# EAGLE board PCB (EAGLE 9.7.0)
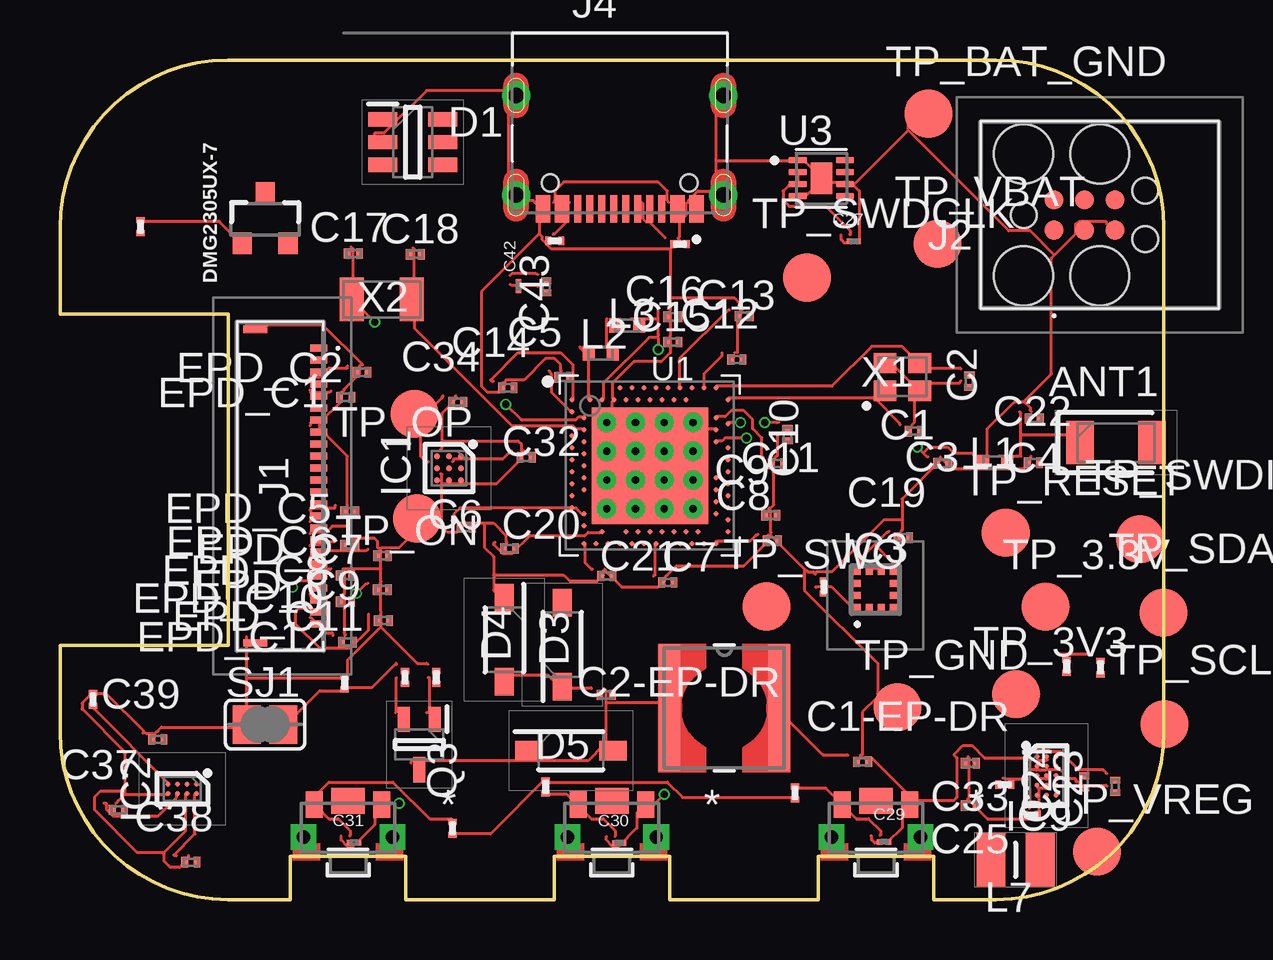
[diagram p0: board, top side]
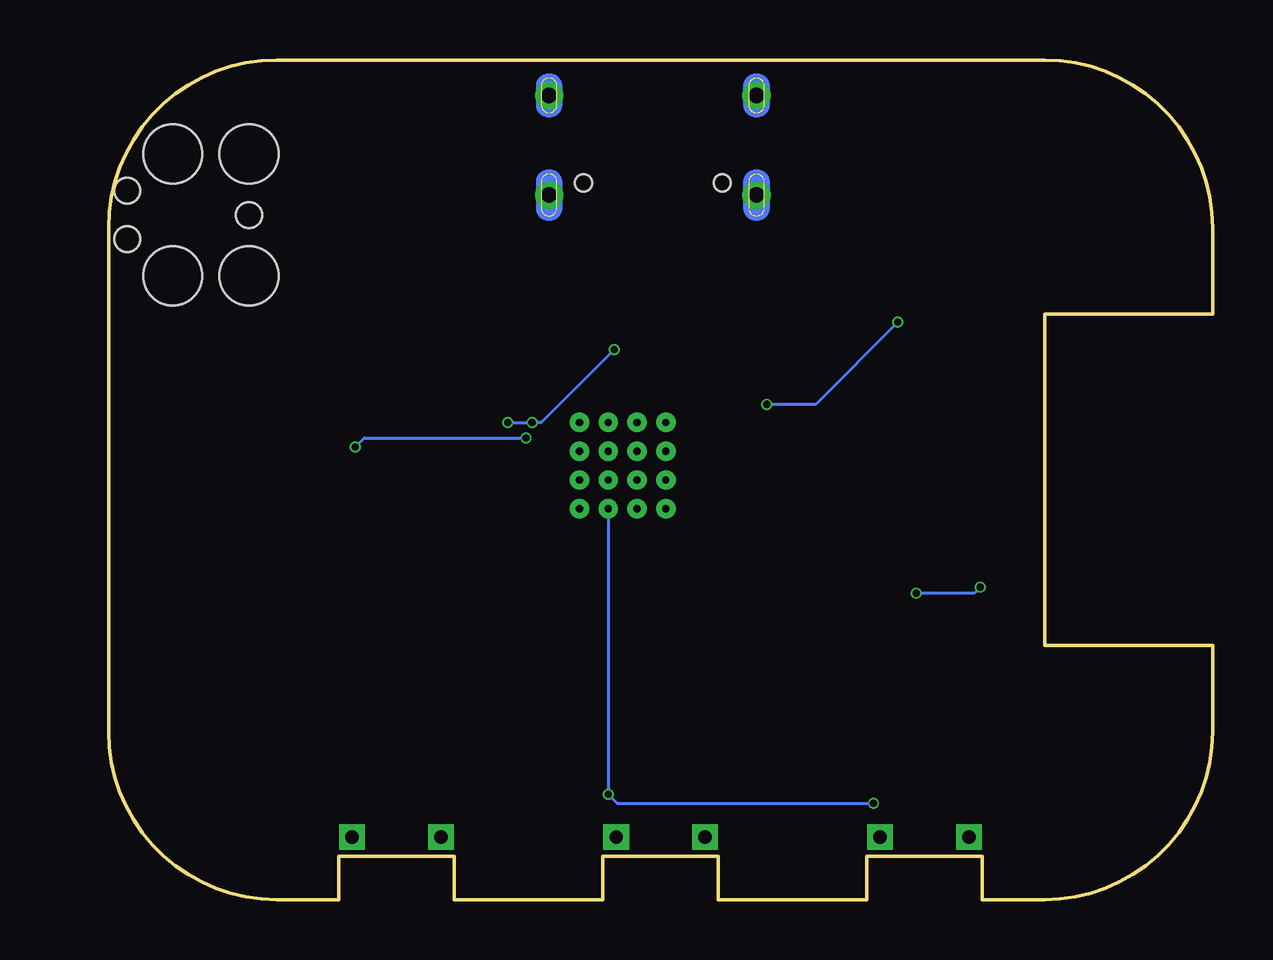
[diagram p1: board, bottom side, seen from below]

Size 46 x 35 mm. Coordinates in mm from the lower left corner, seen from the top.
Outline: 39,0 36.4,0 36.4,1.8 31.6,1.8 31.6,0 25.4,0 25.4,1.8 20.6,1.8 20.6,0 14.4,0 14.4,1.8 9.6,1.8 9.6,0 7,0 arc-90 0,7 0,10.6 7,10.6 7,24.4 0,24.4 0,28 arc-90 7,35 39,35 arc-90 46,28 46,7 arc-90 39,0
Copper layers (1*16): Top 0.035mm / dielectric 1.6mm / Bottom 0.035mm
Design rules "jlcpcb-2layers.dru": minimum track width 5mil, minimum drill 0.3mm, track to track 5mil, track to pad 5mil, pad to pad 5mil, via to via 5mil, smd to smd 5mil, copper to edge 0.2mm, drill to drill 6mil, minimum pad ring 10mil, minimum via ring 3mil, stop-mask expansion 4mil, vias tented up to drill 0mil, thermal gap 10mil

## Footprints (pad centres in the part's own frame; a part is rotated, then mirrored left to right if it is on the bottom)
2450AT18B100E_ANTC3216X140N = smd 1.15 x 1.8: 1 -1.5,0; 2 1.5,0
NORDIC_NRF_3_RESC0201_L = smd 0.28 x 0.43: 1 -0.255,0; 2 0.255,0
GRM011R60J152KE01L_2_CAPC0201X13N = smd 0.22 x 0.23: 1 -0.185,0; 2 0.185,0
ESP32_C6_LIBRARY_3_SOT95P280X145-6N = smd 1.2 x 0.6: 1 -1.25,0.95; 2 -1.25,0; 3 -1.25,-0.95; 4 1.25,-0.95; 5 1.25,0; 6 1.25,0.95
ESP32_C6_LIBRARY_5_SOD3716X135N = smd 1.15 x 0.8: 1 -1.75,0; 2 1.75,0
ESP32_C6_LIBRARY_4_ESP32_C6_LIBRARY_4_ESP32_C6_LIBRARY_4_ESP32_C6_LIBRARY_4_ESP32_WROVER_SPARKFUN-DISCRETESEMI_SOT23-3 = smd 0.8 x 0.9: 1 -0.95,-1; 2 0.95,-1; 3 0,1.1
DRV2605YZFR_BGA9C50P3X3_144X144X62 = smd 0.25 x 0.25: A1 -0.5,0.5; A2 0,0.5; A3 0.5,0.5; B1 -0.5,0; B2 0,0; B3 0.5,0; C1 -0.5,-0.5; C2 0,-0.5; C3 0.5,-0.5
BQ25180YBGR_BGA8C40P2X4_100X155X50 = smd 0.2 x 0.2: A1 -0.2,0.6; A2 0.2,0.6; B1 -0.2,0.2; B2 0.2,0.2; C1 -0.2,-0.2; C2 0.2,-0.2; D1 -0.2,-0.6; D2 0.2,-0.6
BMA423_BMA423 = smd 0.3 x 0.35: 1 -0.75,-0.775; 2 -0.25,-0.775; 3 0.25,-0.775; 4 0.75,-0.775; 7 0.75,0.775; 8 0.25,0.775; 9 -0.25,0.775; 10 -0.75,0.775 | smd 0.35 x 0.3: 5 0.775,-0.25; 6 0.775,0.25; 11 -0.775,0.25; 12 -0.775,-0.25
RT6160AWSC_BGA15C40P3X5_140X230X60 = smd 0.216 x 0.216: A1 -0.4,0.8; A2 0,0.8; A3 0.4,0.8; B1 -0.4,0.4; B2 0,0.4; B3 0.4,0.4; C1 -0.4,0; C2 0,0; C3 0.4,0; D1 -0.4,-0.4; D2 0,-0.4; D3 0.4,-0.4; E1 -0.4,-0.8; E2 0,-0.8; E3 0.4,-0.8
503480-2400_5034802400 = smd 0.3 x 0.7: 1 -5.75,1.525; 2 -5.25,1.525; 3 -4.75,1.525; 4 -4.25,1.525; 5 -3.75,1.525; 6 -3.25,1.525; 7 -2.75,1.525; 8 -2.25,1.525; 9 -1.75,1.525; 10 -1.25,1.525; 11 -0.75,1.525; 12 -0.25,1.525; 13 0.25,1.525; 14 0.75,1.525; 15 1.25,1.525; 16 1.75,1.525; 17 2.25,1.525; 18 2.75,1.525; 19 3.25,1.525; 20 3.75,1.525; 21 4.25,1.525; 22 4.75,1.525; 23 5.25,1.525; 24 5.75,1.525 | smd 0.3 x 1: MP1 -6.54,-1.125; MP2 6.54,-1.125
TC2030-IDC_TC2030IDC = smd 0.783 x 0.783: 1 -0.953,-0.635; 2 -0.953,0.635; 3 0.317,-0.635; 4 0.317,0.635; 5 1.588,-0.635; 6 1.588,0.635 | hole 2.451: -2.223,-2.54; -2.223,2.54; 0.952,-2.54; 0.952,2.54 | hole 1.067: -2.223,0; 2.857,-1.016; 2.857,1.016
KH-TYPE-C-16P_KINGHELM_KH-TYPE-C-16P = smd 0.6 x 1.15: A1_B12 -3.2,4.725; A4_B9 -2.4,4.725; A9_B4 2.4,4.725; A12_B1 3.2,4.725 | smd 0.3 x 1.15: A5 -1.25,4.725; A6 -0.25,4.725; A7 0.25,4.725; A8 1.25,4.725; B5 1.75,4.725; B6 0.75,4.725; B7 -0.75,4.725; B8 -1.75,4.725 | drill 0.65 pad 1.05: SH1 -4.32,0; SH2 4.32,0; SH3 -4.32,4.15; SH4 4.32,4.15 | hole 0.7: -2.89,3.65; 2.89,3.65
NORDIC_NRF_2_RESC0402_L = smd 0.5 x 0.6: 1 -0.5,0; 2 0.5,0
ESP32_C6_LIBRARY_2_IND_4828-WE-TPC_WRE = smd 0.9 x 5.3: 1 -2.286,0; 2 2.286,0
MLP2016SR47MT0S1_INDC2016X100N = smd 1.2 x 2.2: 1 -1.028,0; 2 1.028,0
ESP32_C6_LIBRARY_6_SOT65P210X110-3N = smd 1.05 x 0.5: 1 -1.05,0.65; 2 -1.05,-0.65; 3 1.05,0
ERA-1AEB3401C_0201 = smd 0.35 x 0.25: 1 0,0.275; 2 0,-0.275
ESP32_C6_LIBRARY_7_JUMPER_SJ = smd 1.168 x 1.6: 1 -0.762,0; 2 0.762,0
2025-10-22_07-23-44_LIBRARY_SW_EVP-AKE31A_PAN = smd 0.711 x 1.092: 1 -1.4,-0.972; 2 1.4,-0.972 | drill 0.559 pad 0.914 square: 3 -1.848,0.381; 4 1.848,0.381 | smd 1.397 x 1.092: 5 0,-1.124
HECTOR_WATCH_1_TP20R = smd 2 x 2: TP 0,0
NORDIC_NRF_4_AQFN50P700X700X85_HS-74N = smd 4.85 x 4.85: P$74 0,0 | drill 0.3 pad 0.6: P$75 -1.8,1.8; P$76 -0.6,1.8; P$77 0.6,1.8; P$78 1.8,1.8; P$79 -1.8,0.6; P$80 -0.6,0.6; P$81 0.6,0.6; P$82 1.8,0.6; P$83 -1.8,-0.6; P$84 -0.6,-0.6; P$85 0.6,-0.6; P$86 1.8,-0.6; P$87 -1.8,-1.8; P$88 -0.6,-1.8; P$89 0.6,-1.8; P$90 1.8,-1.8 | smd 0.2 x 0.2: P$A8 -1.25,3.25; P$A10 -0.75,3.25; P$A12 -0.25,3.25; P$A14 0.25,3.25; P$A16 0.75,3.25; P$A18 1.25,3.25; P$A20 1.75,3.25; P$A22 2.25,3.25; P$A23 2.75,3.25; P$AA24 3.25,-2.25; P$AB2 -2.75,-2.5; P$AC5 -2,-2.75; P$AC9 -1,-2.75; P$AC11 -0.5,-2.75; P$AC13 0,-2.75; P$AC15 0.5,-2.75; P$AC17 1,-2.75; P$AC19 1.5,-2.75; P$AC21 2,-2.75; P$AC24 3.25,-2.75; P$AD2 -2.75,-3.25; P$AD4 -2.25,-3.25; P$AD6 -1.75,-3.25; P$AD8 -1.25,-3.25; P$AD10 -0.75,-3.25; P$AD12 -0.25,-3.25; P$AD14 0.25,-3.25; P$AD16 0.75,-3.25; P$AD18 1.25,-3.25; P$AD20 1.75,-3.25; P$AD22 2.25,-3.25; P$AD23 2.75,-3.25; P$B1 -3.25,2.75; P$B3 -2.5,2.75; P$B5 -2,2.75; P$B7 -1.5,2.75; P$B9 -1,2.75; P$B11 -0.5,2.75; P$B13 0,2.75; P$B15 0.5,2.75; P$B17 1,2.75; P$B19 1.5,2.75; P$B24 3.25,2.75; P$C1 -3.25,2.25; P$D2 -2.75,2; P$D23 2.75,2; P$E24 3.25,1.75; P$F2 -2.75,1.5; P$F23 2.75,1.5; P$G1 -3.25,1.25; P$H2 -2.75,1; P$H23 2.75,1; P$J1 -3.25,0.75; P$J24 3.25,0.75; P$K2 -2.75,0.5; P$L1 -3.25,0.25; P$L24 3.25,0.25; P$M2 -2.75,0; P$N1 -3.25,-0.25; P$N24 3.25,-0.25; P$P2 -2.75,-0.5; P$P23 2.75,-0.5; P$R1 -3.25,-0.75; P$R24 3.25,-0.75; P$T2 -2.75,-1; P$T23 2.75,-1; P$U1 -3.25,-1.25; P$U24 3.25,-1.25; P$V23 2.75,-1.5; P$W1 -3.25,-1.75; P$W24 3.25,-1.75; P$Y2 -2.75,-2; P$Y23 2.75,-2
ESP32_C6_LIBRARY_SON50P200X200X80-9N = smd 0.76 x 0.27: 1 -0.985,0.75; 2 -0.985,0.25; 3 -0.985,-0.25; 4 -0.985,-0.75; 5 0.985,-0.75; 6 0.985,-0.25; 7 0.985,0.25; 8 0.985,0.75 | smd 0.9 x 1.3: 9 0,0
NORDIC_NRF_BT-XTAL_2016_N = smd 0.95 x 0.85: 1 -0.725,-0.575; 2 0.725,-0.575; 3 0.725,0.575; 4 -0.725,0.575
NORDIC_NRF_1_XTAL_3215_N = smd 1 x 1.8: 1 -1.25,0; 2 1.25,0

## Placement (x,y rotation side)
ANT1  2450AT18B100E_2450AT18B100E  [2450AT18B100E_ANTC3216X140N]  44,19.05 0 top
C1  12pF  [NORDIC_NRF_3_RESC0201_L]  35.6,19.53 0 top
C1-EP-DR  10µF  [NORDIC_NRF_3_RESC0201_L]  33.45,5.74 0 top
C2  12pF  [NORDIC_NRF_3_RESC0201_L]  37.89,21.61 270 top
C2-EP-DR  4.7µF/25V  [NORDIC_NRF_3_RESC0201_L]  22.75,8.53 0 top
C3  1pF  [NORDIC_NRF_3_RESC0201_L]  36.78,18.18 0 top
C4  1pF  [NORDIC_NRF_3_RESC0201_L]  40.56,18.21 0 top
C5  100nF  [NORDIC_NRF_3_RESC0201_L]  20.99,21.77 0 top
C6  4.7µF  [NORDIC_NRF_3_RESC0201_L]  16.92,15.52 0 top
C7  100nF  [NORDIC_NRF_3_RESC0201_L]  25.33,13.22 0 top
C8  100nF  [NORDIC_NRF_3_RESC0201_L]  29.68,14.95 0 top
C9  820pF  [NORDIC_NRF_3_RESC0201_L]  29.62,16.02 0 top
C10  N.C.  [NORDIC_NRF_3_RESC0201_L]  30.31,19.38 270 top
C11  100pF  [NORDIC_NRF_3_RESC0201_L]  29.89,18.17 0 top
C12  100nF  [NORDIC_NRF_3_RESC0201_L]  28.2,22.51 0 top
C13  N.C.  [NORDIC_NRF_3_RESC0201_L]  28.51,24.32 0 top
C14  4.7µF  [NORDIC_NRF_3_RESC0201_L]  18.66,21.33 0 top
C15  N.C.  [NORDIC_NRF_3_RESC0201_L]  25.53,23.24 0 top
C16  27nF  [NORDIC_NRF_3_RESC0201_L]  25.53,24.29 0 top
C17  12pF  [NORDIC_NRF_3_RESC0201_L]  12.22,26.93 0 top
C18  12pF  [NORDIC_NRF_3_RESC0201_L]  14.8,26.9 0 top
C19  100nF  [NORDIC_NRF_3_RESC0201_L]  35.14,15.08 0 top
C20  4.7µF  [NORDIC_NRF_3_RESC0201_L]  18.73,14.63 0 top
C21  4.7µF  [NORDIC_NRF_3_RESC0201_L]  22.79,13.49 0 top
C22  N.C.  [NORDIC_NRF_3_RESC0201_L]  40.58,20.05 0 top
C23  0.1uF  [NORDIC_NRF_3_RESC0201_L]  43.97,4.72 90 top
C24  10uF  [NORDIC_NRF_3_RESC0201_L]  42.68,4.9 90 top
C25  22uF  [NORDIC_NRF_3_RESC0201_L]  37.92,3.91 180 top
C27  GRM011R60J152KE01L_2_GRM011R60J152KE01L  [GRM011R60J152KE01L_2_CAPC0201X13N]  33.08,27.43 0 top
C29  GRM011R60J152KE01L_2_GRM011R60J152KE01L  [GRM011R60J152KE01L_2_CAPC0201X13N]  34.33,2.4 0 top
C30  GRM011R60J152KE01L_2_GRM011R60J152KE01L  [GRM011R60J152KE01L_2_CAPC0201X13N]  23.3,2.36 0 top
C31  GRM011R60J152KE01L_2_GRM011R60J152KE01L  [GRM011R60J152KE01L_2_CAPC0201X13N]  12.25,2.37 0 top
C32  1µF  [NORDIC_NRF_3_RESC0201_L]  19.42,18.43 0 top
C33  22uF  [NORDIC_NRF_3_RESC0201_L]  37.92,5.68 180 top
C34  0.1µF  [NORDIC_NRF_3_RESC0201_L]  16.57,20.74 0 top
C37  [NORDIC_NRF_3_RESC0201_L]  2.43,3.74 0 top
C38  [NORDIC_NRF_3_RESC0201_L]  5.45,1.56 0 top
C39  [NORDIC_NRF_3_RESC0201_L]  4.07,6.68 0 top
C42  GRM011R60J152KE01L_2_GRM011R60J152KE01L  [GRM011R60J152KE01L_2_CAPC0201X13N]  19.11,25.57 90 top
C43  4.7uF  [NORDIC_NRF_3_RESC0201_L]  20.26,25.54 270 top
D1  ESP32_C6_LIBRARY_3_USBLC6-2SC6Y  [ESP32_C6_LIBRARY_3_SOT95P280X145-6N]  14.7,31.57 0 top
D3  ESP32_C6_LIBRARY_5_MBR0530  [ESP32_C6_LIBRARY_5_SOD3716X135N]  20.93,10.63 90 top
D4  ESP32_C6_LIBRARY_5_MBR0530  [ESP32_C6_LIBRARY_5_SOD3716X135N]  18.51,10.83 270 top
D5  ESP32_C6_LIBRARY_5_MBR0530  [ESP32_C6_LIBRARY_5_SOD3716X135N]  21.29,6.21 0 top
DMG2305UX-7  20V/4.2A/52mΩ/1.4W  [ESP32_C6_LIBRARY_4_ESP32_C6_LIBRARY_4_ESP32_C6_LIBRARY_4_ESP32_C6_LIBRARY_4_ESP32_WROVER_SPARKFUN-DISCRETESEMI_SOT23-3]  8.55,28.36 0 top
EPD_C1  1uF/50V  [NORDIC_NRF_3_RESC0201_L]  11.91,20.93 180 top
EPD_C2  1uF/50V  [NORDIC_NRF_3_RESC0201_L]  12.58,21.98 180 top
EPD_C5  0.1uF/50V  [NORDIC_NRF_3_RESC0201_L]  12.08,16.17 180 top
EPD_C6  0.1uF/50V  [NORDIC_NRF_3_RESC0201_L]  12.07,14.78 180 top
EPD_C7  0.1uF/50V  [NORDIC_NRF_3_RESC0201_L]  13.44,14.33 180 top
EPD_C8  0.1uF/50V  [NORDIC_NRF_3_RESC0201_L]  11.89,13.51 180 top
EPD_C9  0.1uF/50V  [NORDIC_NRF_3_RESC0201_L]  13.43,12.91 180 top
EPD_C10  0.1uF/50V  [NORDIC_NRF_3_RESC0201_L]  11.89,12.41 180 top
EPD_C11  0.1uF/50V  [NORDIC_NRF_3_RESC0201_L]  13.47,11.63 180 top
EPD_C12  0.1uF/50V  [NORDIC_NRF_3_RESC0201_L]  11.98,10.73 180 top
IC1  DRV2605YZFR_DRV2605YZFR  [DRV2605YZFR_BGA9C50P3X3_144X144X62]  16.21,17.98 270 top
IC2  BQ25180YBGR_BQ25180YBGR  [BQ25180YBGR_BGA8C40P2X4_100X155X50]  5.1,4.62 270 top
IC3  BMA423_BMA423  [BMA423_BMA423]  33.97,12.93 0 top
IC9  RT6160AWSC_RT6160AWSC  [RT6160AWSC_BGA15C40P3X5_140X230X60]  41.1,5.16 0 top
J1  503480-2400_503480-2400  [503480-2400_5034802400]  9.25,17.23 270 top
J2  TC2030-IDC_TC2030-IDC  [TC2030-IDC_TC2030IDC]  42.37,28.54 0 top
J4  KH-TYPE-C-16P_KH-TYPE-C-16P  [KH-TYPE-C-16P_KINGHELM_KH-TYPE-C-16P]  23.32,33.52 180 top
L1  3.9nH  [NORDIC_NRF_2_RESC0402_L]  38.97,18.22 0 top
L2  10µH  [NORDIC_NRF_2_RESC0402_L]  22.52,22.77 0 top
L3  15nH  [NORDIC_NRF_2_RESC0402_L]  23.64,23.93 0 top
L5  68uH  [ESP32_C6_LIBRARY_2_IND_4828-WE-TPC_WRE]  27.68,7.98 0 top
L7  MLP2016SR47MT0S1_FTC252012SR47MBCA  [MLP2016SR47MT0S1_INDC2016X100N]  39.82,1.65 0 top
Q3  ESP32_C6_LIBRARY_6_SI1308EDL-T1-GE3  [ESP32_C6_LIBRARY_6_SOT65P210X110-3N]  14.97,6.47 270 top
R1_EP_DR  ERA-1AEB3401C_CPF0201D7K68C1  [ERA-1AEB3401C_0201]  14.37,9.26 0 top
R1_USB  ERA-1AEB3401C_CPF0201D7K68C1  [ERA-1AEB3401C_0201]  25.83,27.32 90 top
R2  ERA-1AEB3401C_CPF0201D7K68C1  [ERA-1AEB3401C_0201]  40.47,3.53 90 top
R2_EP_DR  ERA-1AEB3401C_CPF0201D7K68C1  [ERA-1AEB3401C_0201]  15.68,9.27 0 top
R2_USB  ERA-1AEB3401C_CPF0201D7K68C1  [ERA-1AEB3401C_0201]  20.61,27.46 270 top
R3  ERA-1AEB3401C_CPF0201D7K68C1  [ERA-1AEB3401C_0201]  31.83,13.03 0 top
R4  ERA-1AEB3401C_CPF0201D7K68C1  [ERA-1AEB3401C_0201]  39.36,4.79 90 top
R5  ERA-1AEB3401C_CPF0201D7K68C1  [ERA-1AEB3401C_0201]  20.24,4.7 180 top
R7  ERA-1AEB3401C_CPF0201D7K68C1  [ERA-1AEB3401C_0201]  30.63,4.45 0 top
R8  ERA-1AEB3401C_CPF0201D7K68C1  [ERA-1AEB3401C_0201]  16.35,2.97 0 top
R9  ERA-1AEB3401C_CPF0201D7K68C1  [ERA-1AEB3401C_0201]  1.37,8.34 0 top
R17  ERA-1AEB3401C_CPF0201D7K68C1  [ERA-1AEB3401C_0201]  41.95,9.71 0 top
R18  ERA-1AEB3401C_CPF0201D7K68C1  [ERA-1AEB3401C_0201]  43.35,9.67 0 top
R_PWR_EPD  ERA-1AEB3401C_CPF0201D7K68C1  [ERA-1AEB3401C_0201]  3.35,28.06 0 top
R_TYPE_SEL  ERA-1AEB3401C_CPF0201D7K68C1  [ERA-1AEB3401C_0201]  11.86,9.03 0 top
SJ1  [ESP32_C6_LIBRARY_7_JUMPER_SJ]  8.55,7.3 0 top
SW_DN  2025-10-22_07-23-44_LIBRARY_EVP-AKE31ASW_EVP-AKE31A_PAN  [2025-10-22_07-23-44_LIBRARY_SW_EVP-AKE31A_PAN]  34,2.99 180 top
SW_ENT  2025-10-22_07-23-44_LIBRARY_EVP-AKE31ASW_EVP-AKE31A_PAN  [2025-10-22_07-23-44_LIBRARY_SW_EVP-AKE31A_PAN]  12,2.99 180 top
SW_UP  2025-10-22_07-23-44_LIBRARY_EVP-AKE31ASW_EVP-AKE31A_PAN  [2025-10-22_07-23-44_LIBRARY_SW_EVP-AKE31A_PAN]  23,2.99 180 top
TP_3.3V  HECTOR_WATCH_1_TPTP20R  [HECTOR_WATCH_1_TP20R]  41.06,12.21 0 top
TP_3V3  HECTOR_WATCH_1_TPTP20R  [HECTOR_WATCH_1_TP20R]  39.84,8.56 0 top
TP_BAT_GND  HECTOR_WATCH_1_TPTP20R  [HECTOR_WATCH_1_TP20R]  36.19,32.76 0 top
TP_GND  HECTOR_WATCH_1_TPTP20R  [HECTOR_WATCH_1_TP20R]  34.9,8.02 0 top
TP_ON  HECTOR_WATCH_1_TPTP20R  [HECTOR_WATCH_1_TP20R]  14.88,15.89 0 top
TP_OP  HECTOR_WATCH_1_TPTP20R  [HECTOR_WATCH_1_TP20R]  14.77,20.26 0 top
TP_RESET  HECTOR_WATCH_1_TPTP20R  [HECTOR_WATCH_1_TP20R]  39.41,15.29 0 top
TP_SCL  HECTOR_WATCH_1_TPTP20R  [HECTOR_WATCH_1_TP20R]  46.02,7.31 0 top
TP_SDA  HECTOR_WATCH_1_TPTP20R  [HECTOR_WATCH_1_TP20R]  45.97,11.96 0 top
TP_SWDCLK  HECTOR_WATCH_1_TPTP20R  [HECTOR_WATCH_1_TP20R]  31.12,25.93 0 top
TP_SWDIO  HECTOR_WATCH_1_TPTP20R  [HECTOR_WATCH_1_TP20R]  45,15.03 0 top
TP_SWO  HECTOR_WATCH_1_TPTP20R  [HECTOR_WATCH_1_TP20R]  29.43,12.22 0 top
TP_VBAT  HECTOR_WATCH_1_TPTP20R  [HECTOR_WATCH_1_TP20R]  36.57,27.34 0 top
TP_VREG  HECTOR_WATCH_1_TPTP20R  [HECTOR_WATCH_1_TP20R]  43.22,2.01 0 top
U1  NORDIC_NRF_4_NRF52840_QF  [NORDIC_NRF_4_AQFN50P700X700X85_HS-74N]  24.58,18.09 0 top
U3  ESP32_C6_LIBRARY_MAX17048G+T10  [ESP32_C6_LIBRARY_SON50P200X200X80-9N]  31.72,30.07 0 top
X1  [NORDIC_NRF_BT-XTAL_2016_N]  35.1,21.79 0 top
X2  32.768kHz  [NORDIC_NRF_1_XTAL_3215_N]  13.41,25.02 0 top

## Library data of the parts
ANT1 = InkTime_v5; ARROW_PART_NUMBER: 2450AT18B100E; ARROW_PRICE-STOCK: https://www.arrow.com/en/products/2450at18b100e/johanson-dielectrics?utm_currency=USD&region=nac; DESCRIPTION: Antennas 2.45GHz ANTENNA; HEIGHT: 1.4mm; MANUFACTURER_NAME: JOHANSON TECHNOLOGY; MANUFACTURER_PART_NUMBER: 2450AT18B100E; MOUSER_PART_NUMBER: 609-2450AT18B100E; MOUSER_PRICE-STOCK: https://www.mouser.co.uk/ProductDetail/Johanson-Technology/2450AT18B100E?qs=yCnrNFeXz%252Bh5MFsFIXGZGA%3D%3D
C1 C1-EP-DR C2 C2-EP-DR C3-C25 C32-C34 C37-C39 C43 EPD_C1 EPD_C2 EPD_C5-EPD_C12 L1-L3 R1_EP_DR R1_USB R2 R2_EP_DR R2_USB R3-R5 R7-R9 R17 R18 R_PWR_EPD R_TYPE_SEL SJ1 TP_3.3V TP_3V3 TP_BAT_GND TP_GND TP_ON TP_OP TP_RESET TP_SCL TP_SDA TP_SWDCLK TP_SWDIO TP_SWO TP_VBAT TP_VREG U1 X1 X2 = InkTime_v5
C27 C29-C31 C42 = InkTime_v5; AVAILABILITY: In Stock; CHECK_PRICES: https://www.snapeda.com/parts/GRM011R60J152KE01L/Murata/view-part/?ref=eda; DESCRIPTION: SMD Capacitor X5R(EIA) with Capacitance: 1500pF Tol. 10%. Rated Voltage: 6.3Vdc; MF: Murata; MP: GRM011R60J152KE01L; PACKAGE: 0201 Murata; PRICE: None; SNAPEDA_LINK: https://www.snapeda.com/parts/GRM011R60J152KE01L/Murata/view-part/?ref=snap
D1 = InkTime_v5; AVAILABILITY: In Stock; CHECK_PRICES: https://www.snapeda.com/parts/USBLC6-2SC6Y/STMicroelectronics/view-part/?ref=eda; DESCRIPTION: 17V Clamp 5A (8/20µs) Ipp Tvs Diode Surface Mount SOT-23-6; MF: STMicroelectronics; MP: USBLC6-2SC6Y; PACKAGE: SOT-23-6 STMicroelectronics; PRICE: None; SNAPEDA_LINK: https://www.snapeda.com/parts/USBLC6-2SC6Y/STMicroelectronics/view-part/?ref=snap
D3-D5 = InkTime_v5; AVAILABILITY: In Stock; CHECK_PRICES: https://www.snapeda.com/parts/MBR0530/Onsemi/view-part/?ref=eda; DESCRIPTION: Diode Schottky 30 V 500mA Surface Mount SOD-123; MF: ON Semiconductor; MP: MBR0530; PACKAGE: SOD-123-2 ON Semiconductor; PRICE: None; PURCHASE-URL: https://www.snapeda.com/api/url_track_click_mouser/?unipart_id=179458&manufacturer=ON Semiconductor&part_name=MBR0530&search_term=None; SNAPEDA_LINK: https://www.snapeda.com/parts/MBR0530/Onsemi/view-part/?ref=snap
DMG2305UX-7 = InkTime_v5; PROD_ID: TRAN-14388
IC1 = InkTime_v5; ARROW_PART_NUMBER: DRV2605YZFR; ARROW_PRICE-STOCK: https://www.arrow.com/en/products/drv2605yzfr/texas-instruments?region=nac; DESCRIPTION: Haptic Driver for ERM/LRA with Built-In Library and Smart Loop Architecture; HEIGHT: 0.625mm; MANUFACTURER_NAME: Texas Instruments; MANUFACTURER_PART_NUMBER: DRV2605YZFR
IC2 = InkTime_v5; ARROW_PART_NUMBER: BQ25180YBGR; ARROW_PRICE-STOCK: https://www.arrow.com/en/products/bq25180ybgr/texas-instruments?utm_currency=USD&region=nac; DESCRIPTION: Charger IC Lithium Ion/Polymer, Lithium Iron Phosphate 8-DSBGA (1.6x1.1); HEIGHT: 0.5mm; MANUFACTURER_NAME: Texas Instruments; MANUFACTURER_PART_NUMBER: BQ25180YBGR; MOUSER_PART_NUMBER: 595-BQ25180YBGR; MOUSER_PRICE-STOCK: https://www.mouser.co.uk/ProductDetail/Texas-Instruments/BQ25180YBGR?qs=doiCPypUmgEWjAK%252BJAX6Tw%3D%3D
IC3 = InkTime_v5; ARROW_PART_NUMBER: BMA423; ARROW_PRICE-STOCK: https://www.arrow.com/en/products/bma423/bosch; DESCRIPTION: Accelerometers Triaxial low-g 12bit Acceleration Sensor; HEIGHT: 1mm; MANUFACTURER_NAME: BOSCH; MANUFACTURER_PART_NUMBER: BMA423; MOUSER_PART_NUMBER: 262-BMA423; MOUSER_PRICE-STOCK: https://www.mouser.co.uk/ProductDetail/Bosch-Sensortec/BMA423?qs=HXFqYaX1Q2xC%252BSgeGoX3mg%3D%3D
IC9 = InkTime_v5; DESCRIPTION: Buck-Boost Regulator Positive Output Step-Up/Step-Down I2C DC-DC Controller IC 15-WL-CSP (BSC) (1.4x2.3); HEIGHT: 0.6mm; MANUFACTURER_NAME: RICHTEK; MANUFACTURER_PART_NUMBER: RT6160AWSC; MOUSER_PART_NUMBER: 835-RT6160AWSC; MOUSER_PRICE-STOCK: https://www.mouser.co.uk/ProductDetail/Richtek/RT6160AWSC?qs=amGC7iS6iy%2FLd9PSoixZXQ%3D%3D
J1 = InkTime_v5; DESCRIPTION: FFC & FPC Connectors 0.5mm FPC RA SMT Dual Contact 24Ckt; HEIGHT: 1.87mm; MANUFACTURER_NAME: Molex; MANUFACTURER_PART_NUMBER: 503480-2400; MOUSER_PART_NUMBER: 538-503480-2400; MOUSER_PRICE-STOCK: https://www.mouser.co.uk/ProductDetail/Molex/503480-2400?qs=OAhjpuo3Vu7efIoxFh9AOw%3D%3D
J2 = InkTime_v5; DESCRIPTION: CABLE ADAPTER 6 POS; HEIGHT: 19mm; MANUFACTURER_NAME: Tag Connect; MANUFACTURER_PART_NUMBER: TC2030-IDC
J4 = InkTime_v5; AVAILABILITY: Not in stock; CHECK_PRICES: https://www.snapeda.com/parts/KH-TYPE-C-16P/Kinghelm/view-part/?ref=eda; MF: kinghelm; MP: KH-TYPE-C-16P; PACKAGE: None; PRICE: None; SNAPEDA_LINK: https://www.snapeda.com/parts/KH-TYPE-C-16P/Kinghelm/view-part/?ref=snap
L5 = InkTime_v5; COPYRIGHT: Copyright (C) 2024 Ultra Librarian. All rights reserved.; MANUFACTURER_PART_NUMBER: 744043680; MFR_NAME: Wurth Electronics
L7 = InkTime_v5; DESCRIPTION: SMD / SMT Inductors (Coils), L=0.47?H, L x W x T :; HEIGHT: 1mm; JLCPCB: https://jlcpcb.com/partdetail/6763488-FTC252012SR47MBCA/C5832368; MANUFACTURER_NAME: TDK; MANUFACTURER_PART_NUMBER: FTC252012SR47MBCA
Q3 = InkTime_v5; AVAILABILITY: In Stock; CHECK_PRICES: https://www.snapeda.com/parts/SI1308EDL-T1-GE3/Vishay+Siliconix/view-part/?ref=eda; DESCRIPTION: Si1308EDL-T1-GE3 N-channel MOSFET Transistor, 1.5 A, 30 V, 3-Pin SC-70 | Siliconix / Vishay SI1308EDL-T1-GE3; MF: Vishay Siliconix; MP: SI1308EDL-T1-GE3; PACKAGE: SOT-323 Vishay Semiconductor; PRICE: None; PURCHASE-URL: https://www.snapeda.com/api/url_track_click_mouser/?unipart_id=274603&manufacturer=Vishay Siliconix&part_name=SI1308EDL-T1-GE3&search_term=None; SNAPEDA_LINK: https://www.snapeda.com/parts/SI1308EDL-T1-GE3/Vishay+Siliconix/view-part/?ref=snap
SW_DN SW_ENT SW_UP = InkTime_v5; COPYRIGHT: Copyright (C) 2025 Ultra Librarian. All rights reserved.; DIGI-KEY_PART_NUMBER_1: P123437TR-ND; DIGI-KEY_PART_NUMBER_2: P123437CT-ND; DIGI-KEY_PART_NUMBER_3: P123437DKR-ND; MANUFACTURER_NAME: Panasonic; MANUFACTURER_PART_NUMBER: EVP-AKE31A
U3 = InkTime_v5; AVAILABILITY: In Stock; CHECK_PRICES: https://www.snapeda.com/parts/MAX17048G+T10/Analog+Devices/view-part/?ref=eda; DESCRIPTION: 3µA 1-Cell/2-Cell Fuel Gauge with ModelGauge; MF: Analog Devices; MP: MAX17048G+T10; PACKAGE: TDFN-8 Maxim; PRICE: None; PURCHASE-URL: https://www.snapeda.com/api/url_track_click_mouser/?unipart_id=329239&manufacturer=Analog Devices&part_name=MAX17048G+T10&search_term=None; SNAPEDA_LINK: https://www.snapeda.com/parts/MAX17048G+T10/Analog+Devices/view-part/?ref=snap

## Nets
GND: C1-EP-DR.2 C3.2 C4.2 C5.2 C6.2 C7.2 C8.2 C9.2 C10.2 C11.2 C12.2 C13.2 C14.2 C15.2 C16.2 C19.2 C20.2 C21.2 C22.2 C23.1 C24.1 C25.2 C27.1 C29.1 C30.1 C31.1 C32.2 C33.2 C34.2 C37.2 C38.2 C39.1 C39.2 D1.2 D4.1 EPD_C1.1 EPD_C2.1 EPD_C5.1 EPD_C6.1 EPD_C7.1 EPD_C8.1 EPD_C9.1 EPD_C10.1 EPD_C11.1 EPD_C12.1 IC1.B1 IC1.B3 IC2.B2 IC2.D2 IC9.B1 IC9.C1 IC9.C2 IC9.C3 J1.8 J1.17 J1.MP1 J1.MP2 J2.3 J2.5 J4.A1_B12 J4.A12_B1 J4.SH1 J4.SH2 J4.SH3 J4.SH4 R1_USB.2 R2_EP_DR.1 R2_USB.2 R3.1 R9.1 R_TYPE_SEL.1 SJ1.1 SW_DN.1 SW_ENT.1 SW_UP.1 TP_BAT_GND.TP TP_GND.TP U1.P$74 U1.P$75 U1.P$76 U1.P$77 U1.P$78 U1.P$79 U1.P$80 U1.P$81 U1.P$82 U1.P$83 U1.P$84 U1.P$85 U1.P$86 U1.P$87 U1.P$88 U1.P$89 U1.P$90 U1.P$B7 U1.P$F23 U3.1 U3.4 U3.6 U3.9
GND1: R1_EP_DR.1 R_TYPE_SEL.2 SJ1.2
GND2: C29.2 R7.1 SW_DN.2
GND3: C31.2 R8.1 SW_ENT.2
GND4: C30.2 R5.1 SW_UP.2
N$1: IC2.D1 R9.2
N$2: IC2.A1
N$3: C38.1 IC2.A2
N$4: IC2.B1
N$5: L7.1
N$6: L7.2
N$7: C37.1 IC2.C2
N$8: C23.2 C24.2 IC9.A1 IC9.A2 IC9.A3
N$9: TP_3V3.TP
N$10: IC9.B2 IC9.B3
N$13: TP_VREG.TP
N$14: IC9.D1 R4.2
N$15: R4.1
N$16: R17.1 R18.1
N$17: R17.2
N$18: R18.2
N$19: TP_SCL.TP
N$20: TP_SDA.TP
N$21: IC9.D2 IC9.D3
N$22: C25.1 C33.1 IC9.E2 IC9.E3
N$23: IC9.E1 R2.2
N$24: R2.1
N$25: C19.1 IC3.7 IC3.10
N$26: IC3.3
N$27: IC3.2
N$28: IC3.6
N$29: IC3.5
N$30: IC3.12
N$31: IC3.8 IC3.9
N$32: IC3.1 R3.2
N$33: TP_3.3V.TP
N$34: TP_RESET.TP
N$35: TP_SWDCLK.TP
N$36: TP_SWDIO.TP
N$37: TP_SWO.TP
N$38: J2.1
N$39: J2.2
N$40: J2.4
N$41: J2.6
N$42: C7.1 U1.P$AD14
N$43: C21.1 U1.P$AD2
N$44: U1.P$AD22
N$45: U1.P$AC21
N$46: U1.P$AD20
N$47: U1.P$AC19
N$48: U1.P$AD18
N$49: U1.P$AC17
N$50: U1.P$AD16
N$51: U1.P$AC15
N$52: U1.P$AC13
N$53: U1.P$AD12
N$54: U1.P$AC11
N$55: U1.P$AD10
N$56: U1.P$AC9
N$57: U1.P$AD8
N$58: U1.P$AD6
N$59: U1.P$AD4
N$60: C8.1 U1.P$AD23
N$61: U1.P$N24
N$62: C9.1
N$63: U1.P$AA24
N$64: U1.P$AC24
N$65: U1.P$Y23
N$66: U1.P$W24
N$67: U1.P$V23
N$68: U1.P$U24
N$69: U1.P$T23
N$70: U1.P$R24
N$71: U1.P$P23
N$72: U1.P$L24
N$73: U1.P$J24
N$74: C3.1 L1.1 U1.P$H23
N$75: ANT1.1 C4.1 C22.1 L1.2
N$76: C10.1 C15.1 C16.1 L3.2 U1.P$B5 U1.P$E24
N$77: C11.1 U1.P$D23
N$78: C1.1 U1.P$B24 X1.1
N$79: C2.1 U1.P$A23 X1.3
N$80: C1.2 C2.2 X1.2 X1.4
N$81: C12.1 U1.P$A22
N$82: U1.P$A20
N$83: U1.P$B19
N$84: U1.P$B17
N$85: U1.P$A16
N$86: U1.P$B15
N$87: U1.P$A14
N$88: U1.P$B13
N$89: U1.P$A12
N$90: U1.P$B11
N$91: U1.P$A10
N$92: U1.P$B9
N$93: U1.P$A8
N$94: C13.1 U1.P$A18
N$95: L2.2 L3.1
N$96: L2.1 U1.P$B3
N$97: C20.1 U1.P$AC5
N$98: C6.1 U1.P$W1 U1.P$Y2
N$99: U1.P$U1
N$100: U1.P$T2
N$101: U1.P$R1
N$102: U1.P$P2
N$103: U1.P$N1
N$104: U1.P$M2
N$105: U1.P$L1
N$106: U1.P$K2
N$107: U1.P$J1
N$108: U1.P$H2
N$109: U1.P$G1
N$110: C14.1 U1.P$B1
N$111: C5.1 U1.P$C1
N$112: C17.2 U1.P$D2 X2.1
N$113: C17.1
N$114: C18.2 U1.P$F2 X2.2
N$115: C18.1
N$116: DMG2305UX-7.3
N$117: DMG2305UX-7.2
N$118: C1-EP-DR.1 L5.2
N$119: C2-EP-DR.2 D5.2 L5.1 Q3.3
N$120: C2-EP-DR.1 D3.1 D4.2
N$121: D3.2
N$122: D5.1
N$123: Q3.1 R2_EP_DR.2
N$124: Q3.2 R1_EP_DR.2
N$125: DMG2305UX-7.1 R_PWR_EPD.1
N$126: R_PWR_EPD.2
N$127: TP_OP.TP
N$128: TP_ON.TP
N$129: IC1.A1
N$130: IC1.A3
N$131: IC1.B2
N$132: C32.1 IC1.A2
N$133: IC1.C3
N$134: C34.1 IC1.C2
N$135: IC1.C1
N$136: R5.2 R7.2 R8.2
N$137: TP_VBAT.TP
N$138: U3.5
N$139: U3.7
N$140: U3.8
N$141: C27.2 U3.2 U3.3
N$142: J1.2
N$143: J1.3
N$144: J1.9
N$145: J1.10
N$146: J1.11
N$147: J1.12
N$148: J1.13
N$149: J1.14
N$150: EPD_C12.2 J1.24
N$151: EPD_C2.2 J1.4
N$152: EPD_C1.2 J1.5
N$153: EPD_C5.2 J1.15 J1.16
N$154: EPD_C11.2 J1.23
N$155: EPD_C10.2 J1.22
N$156: EPD_C9.2 J1.21
N$157: EPD_C8.2 J1.20
N$158: EPD_C7.2 J1.19
N$159: EPD_C6.2 J1.18
N$160: J4.B6
N$161: J4.B7
N$162: J4.A4_B9 J4.A9_B4
N$163: J4.A6
N$164: J4.A7
N$165: J4.B5 R2_USB.1
N$166: J4.A5 R1_USB.1
N$167: D1.3
N$168: D1.1
N$169: D1.6
N$170: D1.5
N$171: D1.4
N$172: C42.2 C43.1
N$173: C42.1 C43.2
SDA/2.4C: IC2.C1

## Tracks (layer width: path | path; a pad name or v marks a point on that pad's centre or on a via)
GND  (via drill 0.3)
  Top 0.127: 11.71,2.64 11.72,2.61 11.72,2.48 11.97,2.23 12.22,2.23 13.11,3.12 13.11,3.62 13.37,3.88 SW_ENT.1 13.49,4.01 v14.13,4.01 | 22.77,2.63 22.76,2.61 22.76,2.48 23.02,2.23 23.27,2.23 24.03,2.99 24.03,3.62 24.29,3.88 SW_UP.1 24.42,4.01 24.8,4.01 v25.18,4.39 | 26.45,19.88 26.7,19.63 27.34,19.63 U1.P$F23 | 22.89,20.01 23.02,20.13 23.02,20.77 U1.P$B7 23.02,20.9 23.02,21.53 23.91,22.42 25.05,22.42 25.43,22.8 25.43,23.44 25.44,23.51 25.43,23.56 25.43,24.45 25.43,24.56 25.43,24.58 25.43,25.09 | 23.91,16.32 22.89,16.32 U1.P$87 | 23.91,16.32 U1.P$88 24.03,16.32 25.05,16.32 U1.P$89 | 23.91,16.32 U1.P$74 | 22.76,18.61 22.76,17.59 U1.P$83 | U1.P$84 24.03,17.47 24.29,17.47 U1.P$74 | U1.P$85 25.05,17.59 24.67,17.98 U1.P$74 | 22.76,18.61 U1.P$79 | 22.76,18.61 U1.P$74 | U1.P$80 24.03,18.74 U1.P$74 | U1.P$81 25.18,18.74 U1.P$74 | 26.45,17.47 26.45,16.32 U1.P$90 | 26.45,17.47 U1.P$86 | 26.45,17.47 U1.P$74 | 25.81,19.25 26.32,18.74 U1.P$82 | 22.89,20.01 U1.P$75 | 22.89,20.01 U1.P$74 | U1.P$76 23.91,19.88 23.4,19.37 U1.P$74 | 25.81,19.25 25.18,19.88 U1.P$77 | 25.81,19.25 U1.P$74 | 26.45,19.88 U1.P$78 | 26.45,19.88 U1.P$74 | 13.1,31.84 13.11,31.95 13.49,31.95 15.27,33.72 18.57,33.72 18.65,33.79 18.7,33.72 18.7,29.66 18.65,29.64 18.7,29.53 19.08,29.15 19.72,29.15 19.77,29.07 19.84,29.02 19.97,28.9 19.97,27.75 | 20.89,22.04 20.86,22.04 20.86,22.29 20.61,22.55 20.22,22.55 19.34,21.66 18.57,21.66 18.56,21.6 18.45,21.53 18.45,21.28 18.32,21.15 17.81,21.15 17.56,21.4 17.56,25.34 19.97,27.75 | 19.97,27.75 19.98,27.74 20.1,27.63 20.1,27.5 20.48,27.12 25.43,27.12 | 33.05,29.79 33.31,29.53 33.31,27.5 33.18,27.37 32.67,27.37 32.54,27.5 32.54,27.63 32.54,27.7
  Top 0.127: 33.05,29.79 32.8,29.79 U3.6 | 31.65,29.91 31.78,30.04 U3.9 | 31.65,29.91 31.15,29.41 30.77,29.41 U3.4 | U3.9 31.65,30.17 31.02,30.8 30.77,30.8 U3.1 30.64,30.8 27.34,30.8 | 31.65,29.91 32.67,29.91 U3.6 | 31.65,29.91 U3.9 | 35.34,32.07 35.34,33.22 35.39,33.26 | 33.05,29.79 35.34,32.07 | 33.05,29.79 U3.6 | 28.1,22.78 28.23,22.8 28.23,24.2 28.35,24.33 28.35,24.58 28.41,24.59 28.35,24.71 28.35,24.83 28.1,25.09 25.43,25.09 | 25.43,27.12 25.43,25.09 | 25.43,27.12 25.81,27.5 25.76,27.59 25.81,27.63 25.81,28.26 26.07,28.52 26.07,29.02 26.17,29.07 26.19,29.15 26.57,29.53 27.21,29.53 27.29,29.64 27.34,29.66 27.34,30.8 | 27.34,30.8 27.34,33.72 27.29,33.79 | 40.42,5.4 40.67,5.4 40.75,5.43 40.8,5.4 41.05,5.4 41.15,5.43 41.18,5.4 41.69,5.4 42.07,5.02 42.32,5.02 42.33,4.92 42.45,4.89 42.58,4.77 43.59,4.77 43.62,4.73 | 40.42,5.4 40.42,5.78 40.35,5.83 40.29,5.91 38.51,5.91 38,6.42 37.62,6.42 37.24,6.04 37.31,5.95 37.37,5.91 37.37,4.26 37.31,4.18 37.24,4.13 35.59,4.13 | 40.42,5.4 40.35,5.43 | 33.8,2.67 33.81,2.61 33.81,2.48 33.94,2.35 34.45,2.35 35.08,2.99 35.08,3.62 35.34,3.88 SW_DN.1 | 35.59,4.13 35.46,4.01 SW_DN.1 | 35.59,4.13 33.81,5.91 33.43,5.91 33.35,6.01 33.43,6.04 33.43,7.82 34.07,8.45 34.1,8.52 34.07,8.58 34.07,9.85 31.02,12.9 31.02,13.78 | 35.59,4.13 SW_DN.1 | 29.96,19.39 29.88,19.37 29.88,18.48 29.8,18.44 29.75,18.36 29.75,16.45 29.62,16.32 29.53,16.29 29.62,16.2 29.62,15.31 29.59,15.22 | 31.02,13.78 29.62,15.18 29.59,15.22 | 31.02,13.78 31.15,13.66 31.4,13.66 31.48,13.57 31.53,13.66 32.16,13.66 34.32,15.82 35.08,15.82 | 43.61,28.18 43.59,28.26 42.45,28.26 42.34,28.18 42.32,28.14 42.32,27.75 41.43,26.87
  Top 0.127: 35.08,15.82 35.08,16.71 36.73,18.36 | 35.08,15.82 35.08,15.44 35.05,15.35 | 38.64,17.98 37.12,17.98 36.73,18.36 | 38.64,17.98 40.16,17.98 40.42,18.23 40.42,18.36 40.46,18.48 | 36.73,18.36 36.68,18.45 | 40.16,20.77 40.42,20.52 40.42,20.39 40.49,20.32 | 40.16,20.77 39.78,20.77 38.64,19.63 38.64,17.98 | 41.43,26.87 41.31,26.74 41.31,21.91 40.16,20.77 | 15.91,19.12 15.91,20.26 16.54,20.9 16.47,21.01 | 15.91,19.12 15.91,18.86 15.86,18.76 | 15.91,19.12 19.08,19.12 19.21,18.99 19.21,18.74 19.33,18.7 19.21,18.61 19.21,18.36 18.19,17.34 15.91,17.34 | 15.91,15.56 15.91,17.34 | 15.91,17.34 15.91,17.72 15.86,17.76 | 15.91,15.56 16.16,15.31 16.54,15.31 16.92,15.69 | 16.92,15.69 17.68,15.69 | 17.68,15.69 18.07,15.69 18.57,15.18 18.57,14.93 18.63,14.9 | 16.92,15.69 16.82,15.79 | 18.07,13.53 18.07,14.29 17.68,14.67 17.68,15.69 | 18.07,13.53 18.07,12.9 18.16,12.85 | 18.07,13.53 20.99,13.53 21.24,13.28 22.38,13.28 22.64,13.53 22.64,13.66 22.69,13.76 22.76,13.66 23.4,13.02 24.92,13.02 25.18,13.28 25.18,13.4 25.23,13.49 25.3,13.53 25.69,13.91 28.48,13.91 29.5,14.93 29.5,15.18 29.59,15.22 | 7.78,9.21 7.78,7.31 SJ1.1 7.78,7.18 4.22,7.18 4.1,7.05 3.98,6.95 3.97,6.93 3.59,6.93 3.47,6.95 3.46,7.05 1.94,8.58 1.43,8.58 R9.1 1.3,8.58 0.92,8.2 0.92,7.94 2.7,6.16 2.7,4.51 | 7.78,9.21 7.78,10.86 7.78,10.96 | 4.35,1.97 5.24,2.86 5.24,4.39 IC2.B2 | 4.35,1.97 4.35,1.59 4.6,1.34 4.98,1.34 5.37,1.72 5.36,1.83 | 2.7,4.39 4.48,4.39 IC2.D2 | 2.7,4.39 2.44,4.13 2.34,4.01 | 2.7,4.51 2.7,4.39 | 4.35,1.97 3.21,1.97 1.43,3.75 1.43,4.26 1.68,4.51 2.7,4.51 | 10.83,19.88 10.45,19.88 10.43,19.75 | 10.83,19.88 11.72,20.77 11.72,21.15 11.81,21.2 11.84,21.28 12.48,21.91 12.48,22.17 12.49,22.25 12.6,22.29 10.95,23.94 7.78,23.94 7.78,24.04
  Top 0.127: 11.97,15.56 11.97,16.32 11.98,16.44 11.97,16.45 11.97,18.48 10.83,19.63 10.83,19.88 | 11.97,15.56 11.97,15.05 11.98,15.05 12.1,15.05 13.11,15.05 13.24,14.93 13.24,14.67 13.34,14.6 | 11.97,15.56 11.33,15.56 11.08,15.31 10.45,15.31 10.43,15.25 | 11.88,11 11.84,11.12 11.84,12.64 11.8,12.68 11.84,12.77 11.84,13.66 11.8,13.78 11.84,13.78 13.37,13.78 | 13.37,11.37 11.97,9.97 11.97,9.34 R_TYPE_SEL.1 11.84,9.21 7.78,9.21 | 13.37,11.37 13.37,11.88 13.37,11.9 13.37,12.01 13.37,13.15 13.34,13.18 13.37,13.28 13.37,13.78 | 13.37,11.37 14.89,9.85 15.27,9.85 15.33,9.81 | 13.37,13.78 13.37,14.55 13.34,14.6 | 15.91,15.56 15.02,15.56 14.13,14.67 13.37,14.67 13.34,14.6 | 35.34,32.07 39.53,27.88 40.42,27.88 41.43,26.87
  Bottom 0.127: U1.P$89 25.18,16.2 v25.18,4.39 24.8,4.01 v14.13,4.01
GND1
  Top 0.127: 14.02,9.8 14,9.85 12.99,8.83 11.97,8.83 R_TYPE_SEL.2 11.84,8.7 10.83,8.7 9.43,7.31 SJ1.2
GND2
  Top 0.127: 34.17,2.67 34.19,2.74 34.19,2.86 33.69,3.37 33.18,3.37 32.67,3.88 SW_DN.2 32.54,4.01 31.91,4.64 30.64,4.64 R7.1
GND3
  Top 0.127: 12.08,2.64 12.1,2.74 12.1,2.86 11.59,3.37 11.21,3.37 10.7,3.88 SW_ENT.2 10.7,4.01 10.7,4.39 11.21,4.89 13.87,4.89 15.4,3.37 16.29,3.37 R8.1
GND4
  Top 0.127: 23.14,2.63 23.15,2.74 23.15,2.86 22.64,3.37 22.13,3.37 21.62,3.88 SW_UP.2 21.49,4.01 21.11,4.39 20.35,4.39 R5.1
N$1
  Top 0.127: IC2.D1 4.48,4.89 1.43,7.94 R9.2
N$3
  Top 0.127: IC2.A2 5.62,4.39 5.62,2.74 4.73,1.85 4.85,1.83
N$7
  Top 0.127: IC2.C2 4.86,4.39 4.86,4.26 4.1,3.5 2.19,3.5 1.94,3.75 1.94,4.01 1.83,4.01
N$8
  Top 0.127: 40.35,6.23 40.42,6.29 40.67,6.29 40.75,6.23 40.8,6.29 41.18,6.29 41.15,6.23 41.18,6.16 41.69,6.16 42.32,5.53 42.33,5.43 42.45,5.4 43.47,5.4 43.59,5.28 43.62,5.24
N$10
  Top 0.127: 40.75,5.83 40.8,5.78 41.05,5.78 41.15,5.83
N$14
  Top 0.127: 40.35,5.03 40.29,5.02 39.4,5.02 39.29,5.06
N$16
  Top 0.127: 41.6,10.26 41.69,10.23 42.96,10.23 43,10.22
N$21
  Top 0.127: 40.75,5.03 40.8,5.02 41.05,5.02 41.15,5.03
N$22
  Top 0.127: 40.8,4.64 41.05,4.64 41.15,4.63 | 40.8,4.64 40.8,3.62 40.54,3.37 38.64,3.37 37.88,4.13 37.82,4.18 37.88,4.26 37.88,5.91 37.82,5.95 | 40.8,4.64 40.75,4.63
N$23
  Top 0.127: 40.35,4.63 40.42,4.64 40.42,3.88 40.39,3.8
N$25
  Top 0.127: 33.94,14.8 34.45,15.31 34.54,15.35 | 33.94,14.8 33.31,14.17 33.31,13.78 IC3.10 | 33.94,14.8 34.7,14.04 34.7,13.78 IC3.7
N$31
  Top 0.127: IC3.9 33.81,13.78 34.19,13.78 IC3.8
N$32
  Top 0.127: 31.48,13.02 31.53,13.02 32.16,13.02 32.92,12.26 33.18,12.26 IC3.1
N$42
  Top 0.127: U1.P$AD14 24.8,14.8 24.8,13.53 24.72,13.49
N$43
  Top 0.127: U1.P$AD2 21.88,14.8 21.88,14.04 22.13,13.78 22.18,13.76
N$60
  Top 0.127: U1.P$AD23 27.34,14.93 28.73,14.93 28.99,15.18 29.08,15.22
N$74  (via drill 0.3)
  Top 0.127: v28.61,19.25 27.72,19.25 27.59,19.12 27.34,19.12 U1.P$H23 | 35.97,18.61 36.1,18.48 36.17,18.45 | 35.97,18.61 v35.72,18.86 | 35.97,18.61 36.23,18.86 36.99,18.86 37.24,18.61 38,18.61 38.12,18.49
  Bottom 0.127: v28.61,19.25 35.34,19.25 v35.72,18.86
N$75
  Top 0.127: 39.12,18.49 39.15,18.48 39.91,18.48 39.95,18.48 40.04,18.48 40.04,19.37 | 40.04,19.37 40.04,20.26 39.98,20.32 | 40.04,19.37 42.07,19.37 42.15,19.32
N$76  (via drill 0.3)
  Top 0.127: v28.35,19.88 27.84,19.88 U1.P$E24 | v29.37,19.88 29.88,19.88 29.96,19.9 | 24.92,23.44 24.54,23.44 22.64,21.53 22.64,20.9 U1.P$B5 | 24.92,24.2 24.92,23.56 24.93,23.51 24.92,23.44 | 24.92,24.2 24.92,24.45 24.92,24.56 | 24.92,24.2 23.91,24.2 23.79,24.2 | 24.92,23.44 v24.92,22.93
  Bottom 0.127: v29.37,19.88 v28.35,19.88 27.97,19.88 v24.92,22.93
N$77
  Top 0.127: U1.P$D23 27.34,20.13 27.72,20.13 27.97,20.39 28.48,20.39 28.86,20.01 28.86,19.63 29.24,19.25 29.24,18.48 29.29,18.44
N$78
  Top 0.127: 33.94,20.9 34.07,20.9 34.32,21.15 X1.1 33.94,20.9 | 33.94,20.9 27.84,20.9 U1.P$B24 | 33.94,20.9 34.96,19.88 34.99,19.8
N$79
  Top 0.127: U1.P$A23 27.34,21.4 32.16,21.4 33.81,23.06 35.08,23.06 35.72,22.42 X1.3 35.85,22.29 35.97,22.17 37.5,22.17 37.54,22.13
N$80
  Top 0.127: 35.5,19.8 35.59,19.88 35.59,21.02 35.72,21.15 X1.2 | 37.54,21.62 37.5,21.53 36.1,21.53 35.85,21.28 X1.2 | X1.4 34.45,22.29 34.7,22.29 35.72,21.28 X1.2
N$81
  Top 0.127: U1.P$A22 26.83,21.4 26.83,21.91 27.59,22.67 27.59,22.78
N$94
  Top 0.127: U1.P$A18 25.81,21.4 25.81,22.55 27.84,24.58 27.9,24.59
N$95
  Top 0.127: 22.67,23.04 22.76,23.06 22.76,24.2 22.79,24.2
N$96
  Top 0.127: U1.P$B3 22,20.9 22,22.67 21.75,22.93 21.67,23.04
N$97
  Top 0.127: U1.P$AC5 22.51,15.31 22,15.31 21.88,15.18 19.59,15.18 18.83,14.42 18.45,14.42 18.07,14.8 18.12,14.9
N$98
  Top 0.127: U1.P$Y2 21.75,16.07 21.49,16.32 21.37,16.32 U1.P$W1 21.24,16.32 16.67,16.32 16.41,16.07 16.41,15.82 16.31,15.79
N$110
  Top 0.127: U1.P$B1 21.37,20.9 21.37,22.29 20.86,22.8 19.08,22.8 17.94,21.66 18.05,21.6
N$111
  Top 0.127: U1.P$C1 21.24,20.39 20.48,21.15 20.48,21.91 20.38,22.04
N$112  (via drill 0.3)
  Top 0.127: v18.57,20.64 19.21,20.01 21.49,20.01 21.62,20.13 21.75,20.13 U1.P$D2 | v13.11,24.07 12.22,24.96 X2.1 12.22,25.09 12.22,27.12 12.13,27.2
  Bottom 0.127: v18.57,20.64 16.54,20.64 v13.11,24.07
N$114
  Top 0.127: U1.P$F2 21.75,19.63 21.49,19.63 21.37,19.75 18.83,19.75 14.76,23.82 14.76,24.96 X2.2 14.76,25.09 14.76,27.12 14.7,27.17
N$118
  Top 0.127: 32.84,6.01 32.8,6.04 31.78,6.04 29.62,8.2 29.62,8.25
N$119
  Top 0.127: 22.76,8.2 22.76,6.55 22.69,6.48 22.64,6.42 22,5.78 14.64,5.78 14.62,5.69 | 22.76,8.2 22.76,8.7 22.66,8.8 | 22.76,8.2 24.92,8.2 25.05,8.25
N$120
  Top 0.127: 22.15,8.8 22.13,8.83 20.86,8.83 20.61,9.09 20.58,9.15 20.48,9.21 20.35,9.34 18.19,9.34 18.16,9.35
N$123
  Top 0.127: 15.33,9.26 15.4,9.21 15.4,7.82 15.27,7.79
N$124
  Top 0.127: 14.02,9.25 14,9.21 14,7.82 13.97,7.79
N$125
  Top 0.127: R_PWR_EPD.1 3.46,28.26 6.64,28.26 7.14,27.75 7.25,27.63
N$132
  Top 0.127: 16.36,18.26 16.41,18.36 18.45,18.36 18.7,18.61 18.82,18.7
N$134
  Top 0.127: 15.36,18.26 15.27,18.23 15.02,18.48 15.02,20.01 15.91,20.9 15.96,21.01
N$136
  Top 0.127: R8.2 16.41,2.74 17.94,2.74 20.22,5.02 R5.2 20.35,4.89 25.3,4.89 25.94,4.26 30.51,4.26 R7.2
N$141
  Top 0.127: 32.91,27.7 32.92,27.75 32.92,27.88 31.91,28.9 30.38,28.9 30.13,29.15 30.13,29.53 30.38,29.79 30.64,29.79 U3.3 30.77,29.91 30.77,30.29 U3.2
N$150
  Top 0.127: 11.37,11 11.33,11.12 11.08,11.12 10.45,11.75 10.43,11.75
N$151
  Top 0.127: 11.98,22.25 11.97,22.17 11.21,22.17 10.83,21.79 10.45,21.79 10.43,21.75
N$152
  Top 0.127: 11.3,21.2 11.21,21.15 10.45,21.15 10.43,21.25
N$153
  Top 0.127: 11.47,16.44 11.46,16.32 10.45,16.32 10.43,16.25 10.45,16.2 10.45,15.82 10.43,15.75
N$154
  Top 0.127: 12.86,11.9 12.86,11.88 12.86,11.24 12.1,10.48 10.83,10.48 9.81,11.5 9.81,12.01 9.94,12.13 10.32,12.13 10.43,12.25
N$155
  Top 0.127: 11.29,12.68 11.21,12.64 10.45,12.64 10.43,12.75
N$156  (via drill 0.3)
  Top 0.127: v12.35,12.77 12.73,13.15 12.83,13.18 | v9.68,13.02 9.94,13.28 10.32,13.28 10.43,13.25
  Bottom 0.127: v12.35,12.77 9.94,12.77 v9.68,13.02
N$157
  Top 0.127: 11.29,13.78 11.21,13.78 10.45,13.78 10.43,13.75
N$158
  Top 0.127: 12.83,14.6 12.73,14.55 11.08,14.55 10.83,14.29 10.45,14.29 10.43,14.25
N$159
  Top 0.127: 11.47,15.05 11.46,14.93 10.95,14.93 10.83,14.8 10.45,14.8 10.43,14.75
N$162
  Top 0.127: 20.57,29.07 20.61,29.15 20.61,29.53 20.99,29.91 24.92,29.91 25.3,29.53 25.3,29.15 25.37,29.07
N$165
  Top 0.127: 20.53,27.74 20.61,27.75 21.11,28.26 21.11,29.02 21.22,29.07
N$166
  Top 0.127: 25.21,27.59 25.18,27.63 24.54,28.26 24.42,28.26 24.29,28.39 24.29,29.02 24.22,29.07
N$172
  Top 0.127: 18.76,26.02 18.83,26.1 19.84,26.1 19.91,26.07
N$173
  Top 0.127: 18.76,25.65 18.83,25.6 19.84,25.6 19.91,25.56